# EAGLE board BUS_OUT (EAGLE 9.6.2)
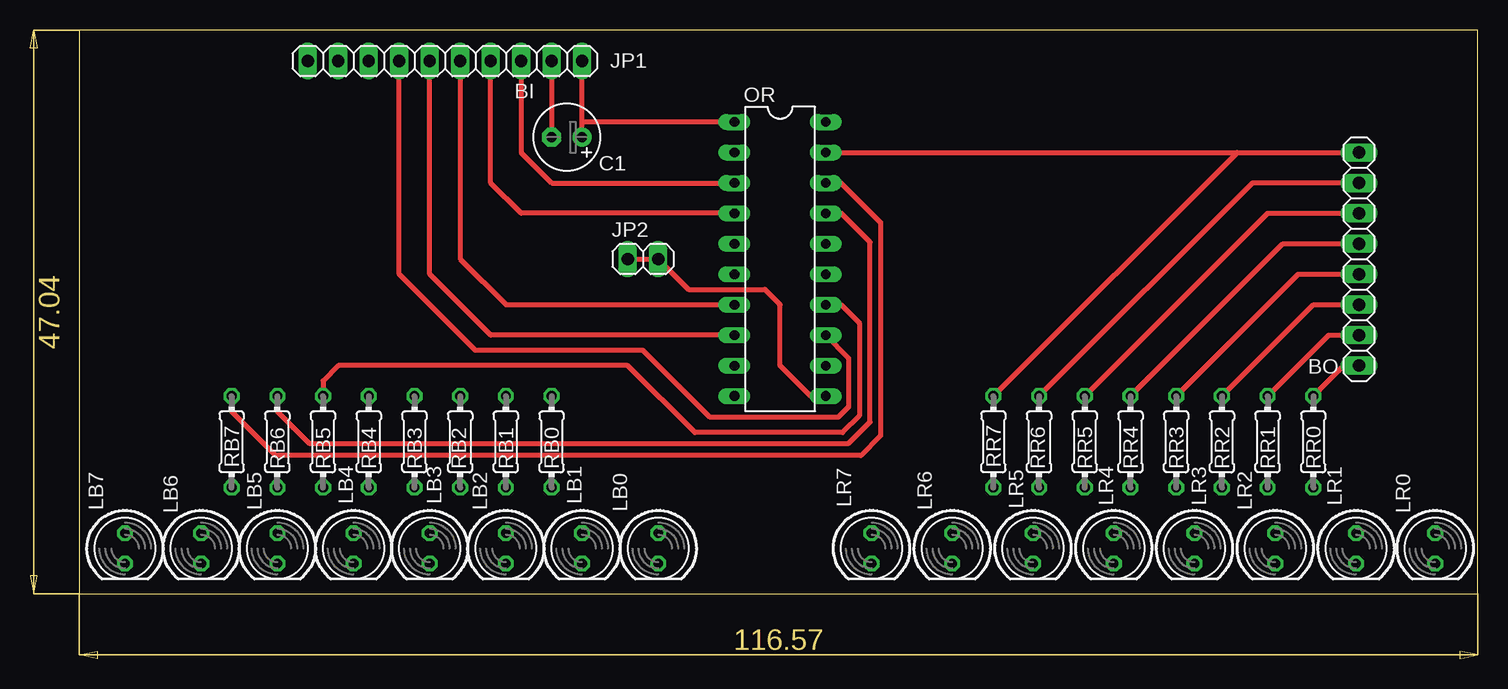
[diagram p0: board, top side]
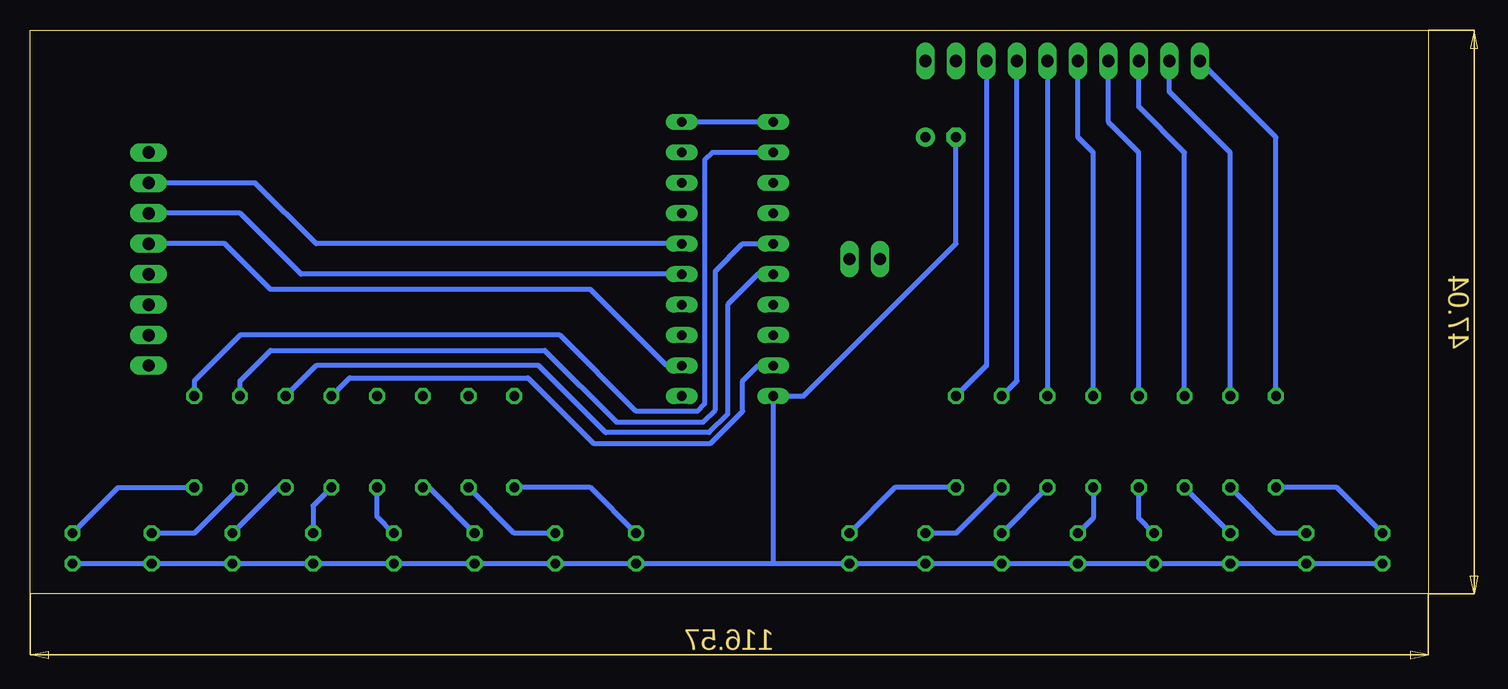
[diagram p1: board, bottom side, seen from below]

Size 116.57 x 47.04 mm. Coordinates in mm from the lower left corner, seen from the top.
Outline: 0,0 116.57,0 116.57,47.04 0,47.04 0,0
Copper layers (1*16): Top 0.035mm / dielectric 1.5mm / Bottom 0.035mm
Design rules "default": minimum track width 6mil, minimum drill 0.35mm, track to track 6mil, track to pad 6mil, pad to pad 6mil, via to via 6mil, smd to smd 6mil, copper to edge 40mil, drill to drill 6mil, minimum pad ring 10mil, minimum via ring 8mil, stop-mask expansion 4mil, vias tented up to drill 0mil, thermal gap 10mil

## Footprints (pad centres in the part's own frame; a part is rotated, then mirrored left to right if it is on the bottom)
1X08 = drill 1.016 long: 1 -8.89,0; 2 -6.35,0; 3 -3.81,0; 4 -1.27,0; 5 1.27,0; 6 3.81,0; 7 6.35,0; 8 8.89,0
E2,5-6 = drill 0.813 pad 1.6: + -1.27,0 | drill 0.813 pad 1.6 octagon: - 1.27,0
1X02 = drill 1.016 long: 1 -1.27,0; 2 1.27,0
LED5MM = drill 0.813 octagon: A -1.27,0; K 1.27,0
DIL20 = drill 0.813 long: 1 -11.43,-3.81; 2 -8.89,-3.81; 3 -6.35,-3.81; 4 -3.81,-3.81; 5 -1.27,-3.81; 6 1.27,-3.81; 7 3.81,-3.81; 8 6.35,-3.81; 9 8.89,-3.81; 10 11.43,-3.81; 11 11.43,3.81; 12 8.89,3.81; 13 6.35,3.81; 14 3.81,3.81; 15 1.27,3.81; 16 -1.27,3.81; 17 -3.81,3.81; 18 -6.35,3.81; 19 -8.89,3.81; 20 -11.43,3.81
0204/7 = drill 0.813 octagon: 1 -3.81,0; 2 3.81,0

## Placement (x,y rotation side)
BI  [1X08]  27.94,44.45 0 top
BO  [1X08]  106.68,27.94 90 top
C1  [E2,5-6]  40.64,38.1 180 top
JP1  [1X02]  40.64,44.45 0 top
JP2  [1X02]  46.99,27.94 0 top
LB0  [LED5MM]  48.26,3.81 270 top
LB1  [LED5MM]  41.91,3.81 270 top
LB2  [LED5MM]  35.56,3.81 270 top
LB3  [LED5MM]  29.21,3.81 270 top
LB4  [LED5MM]  22.86,3.81 270 top
LB5  [LED5MM]  16.51,3.81 270 top
LB6  [LED5MM]  10.16,3.81 270 top
LB7  [LED5MM]  3.81,3.81 270 top
LR0  [LED5MM]  113.03,3.81 270 top
LR1  [LED5MM]  106.43,3.81 270 top
LR2  [LED5MM]  99.69,3.81 270 top
LR3  [LED5MM]  92.96,3.81 270 top
LR4  [LED5MM]  86.23,3.81 270 top
LR5  [LED5MM]  79.5,3.81 270 top
LR6  [LED5MM]  72.77,3.81 270 top
LR7  [LED5MM]  66.04,3.81 270 top
OR  74273N  [DIL20]  58.42,27.94 270 top
RB0  [0204/7]  39.37,12.7 90 top
RB1  [0204/7]  35.56,12.7 90 top
RB2  [0204/7]  31.75,12.7 90 top
RB3  [0204/7]  27.94,12.7 90 top
RB4  [0204/7]  24.13,12.7 90 top
RB5  [0204/7]  20.32,12.7 90 top
RB6  [0204/7]  16.51,12.7 90 top
RB7  [0204/7]  12.7,12.7 90 top
RR0  [0204/7]  102.87,12.7 90 top
RR1  [0204/7]  99.06,12.7 90 top
RR2  [0204/7]  95.25,12.7 90 top
RR3  [0204/7]  91.44,12.7 90 top
RR4  [0204/7]  87.63,12.7 90 top
RR5  [0204/7]  83.82,12.7 90 top
RR6  [0204/7]  80.01,12.7 90 top
RR7  [0204/7]  76.2,12.7 90 top

## Library data of the parts
BI BO JP1 JP2 = pinhead
C1 = rcl; SPICEPREFIX: C
LB0 LB1-LB7 LR0 LR1-LR7 = led
OR = 74ttl-din
RB0 RB1-RB7 RR0 RR1-RR7 = rcl; SPICEPREFIX: R

## Nets
B0: BI.8 OR.3 RB0.2
B1: BI.7 OR.4 RB1.2
B2: BI.6 OR.7 RB2.2
B3: BI.5 OR.8 RB3.2
B4: BI.4 OR.13 RB4.2
B5: BI.3 OR.14 RB5.2
B6: BI.2 OR.17 RB6.2
B7: BI.1 OR.18 RB7.2
CLK: JP2.1 JP2.2 OR.11
GND: C1.- JP1.1 LB0.K LB1.K LB2.K LB3.K LB4.K LB5.K LB6.K LB7.K LR0.K LR1.K LR2.K LR3.K LR4.K LR5.K LR6.K LR7.K OR.10
N$1: LB7.A RB7.1
N$3: LB6.A RB6.1
N$5: LB5.A RB5.1
N$7: LB4.A RB4.1
N$9: LR7.A RR7.1
N$10: LB3.A RB3.1
N$11: BO.8 OR.19 RR7.2
N$12: LR6.A RR6.1
N$14: BO.7 OR.16 RR6.2
N$15: LR5.A RR5.1
N$16: LB2.A RB2.1
N$17: BO.6 OR.15 RR5.2
N$18: LR4.A RR4.1
N$20: BO.5 OR.12 RR4.2
N$21: LR3.A RR3.1
N$22: LB1.A RB1.1
N$23: BO.4 OR.9 RR3.2
N$24: LR2.A RR2.1
N$26: BO.3 OR.6 RR2.2
N$27: LR1.A RR1.1
N$28: LB0.A RB0.1
N$29: BO.2 OR.5 RR1.2
N$30: LR0.A RR0.1
N$32: BO.1 OR.2 RR0.2
VCC: C1.+ JP1.2 OR.1 OR.20

## Tracks (layer width: path | path; a pad name or v marks a point on that pad's centre or on a via)
B0
  Top 0.4: BI.8 36.83,36.83 39.37,34.29 OR.3
  Bottom 0.4: RB0.2 36.83,19.05 BI.8
B1
  Top 0.4: OR.4 36.83,31.75 34.29,34.29 BI.7
  Bottom 0.4: RB1.2 34.29,17.78 BI.7
B2
  Top 0.4: BI.6 31.75,27.94 35.56,24.13 OR.7
  Bottom 0.4: BI.6 RB2.2
B3
  Top 0.4: OR.8 34.29,21.59 29.21,26.67 BI.5
  Bottom 0.4: RB3.2 27.94,36.83 29.21,38.1 BI.5
B4
  Top 0.4: OR.13 64.14,19.68 64.14,15.62 63.25,14.73 52.58,14.73 46.99,20.32 33.02,20.32 26.67,26.67 BI.4
  Bottom 0.4: RB4.2 24.13,36.83 26.67,39.37 BI.4
B5
  Top 0.4: OR.14 63.5,24.13 65.02,22.61 65.02,14.86 63.63,13.46 51.31,13.46 45.72,19.05 21.59,19.05 20.32,17.78 RB5.2
  Bottom 0.4: RB5.2 20.32,36.83 24.13,40.64 BI.3
B6
  Top 0.4: RB6.2 16.51,15.24 19.18,12.57 64.14,12.57 65.91,14.35 65.91,29.34 63.5,31.75 OR.17
  Bottom 0.4: RB6.2 16.51,36.83 21.59,41.91 BI.2
B7
  Top 0.4: OR.18 63.5,34.29 66.8,30.99 66.8,13.21 65.15,11.56 16.38,11.56 12.7,15.24 RB7.2
  Bottom 0.4: RB7.2 12.7,38.1 BI.1
CLK
  Top 0.4: OR.11 60.96,16.51 58.42,19.05 58.42,24.13 57.15,25.4 50.8,25.4 JP2.2 JP2.1
GND
  Top 0.4: JP1.1 C1.-
  Bottom 0.4: LB7.K LB6.K LB5.K LB4.K LB3.K LB2.K LB1.K LB0.K 54.61,2.54 | 54.61,2.54 LR7.K LR6.K LR5.K LR4.K LR3.K LR2.K LR1.K LR0.K | 54.61,2.54 OR.10 52.07,16.51 39.37,29.21 C1.-
N$1
  Bottom 0.4: LB7.A 7.62,8.89 RB7.1
N$3
  Bottom 0.4: LB6.A 12.7,5.08 RB6.1
N$5
  Bottom 0.4: LB5.A RB5.1
N$7
  Bottom 0.4: LB4.A 24.13,6.35 RB4.1
N$9
  Bottom 0.4: LR7.A 69.85,8.89 RR7.1
N$10
  Bottom 0.4: RB3.1 27.94,6.35 LB3.A
N$11
  Top 0.4: RR7.2 96.52,36.83 | 96.52,36.83 BO.8 | OR.19 96.52,36.83
N$12
  Bottom 0.4: LR6.A 76.2,5.08 RR6.1
N$14
  Top 0.4: BO.7 97.79,34.29 RR6.2
  Bottom 0.4: BO.7 97.79,34.29 92.71,29.21 OR.16
N$15
  Bottom 0.4: LR5.A 83.31,8.89 RR5.1
N$16
  Bottom 0.4: RB2.1 LB2.A
N$17
  Top 0.4: RR5.2 99.06,31.75 BO.6
  Bottom 0.4: OR.15 93.98,26.67 99.06,31.75 BO.6
N$18
  Bottom 0.4: LR4.A 87.63,6.48 RR4.1
N$20
  Top 0.4: RR4.2 100.33,29.21 BO.5
  Bottom 0.4: OR.12 63.5,19.05 69.85,25.4 96.52,25.4 100.33,29.21 BO.5
N$21
  Bottom 0.4: RR3.1 92.96,7.37 LR3.A
N$22
  Bottom 0.4: RB1.1 39.37,5.08 LB1.A
N$23
  Top 0.4: RR3.2 101.6,26.67 BO.4
  Bottom 0.4: OR.9 55.88,19.05 57.15,17.78 57.15,15.24 59.82,12.57 69.6,12.57 75.06,18.03 89.92,18.03 RR3.2
N$24
  Bottom 0.4: LR2.A 95.89,8.89 RR2.1
N$26
  Top 0.4: RR2.2 102.87,24.13 BO.3
  Bottom 0.4: OR.6 55.88,26.67 58.42,24.13 58.42,14.99 59.94,13.46 68.58,13.46 74.17,19.05 92.71,19.05 RR2.2
N$27
  Bottom 0.4: RR1.1 102.87,5.08 LR1.A
N$28
  Bottom 0.4: RB0.1 44.45,8.89 LB0.A
N$29
  Top 0.4: RR1.2 104.14,21.59 BO.2
  Bottom 0.4: RR1.2 99.06,17.78 96.52,20.32 73.66,20.32 67.69,14.35 60.45,14.35 59.44,15.37 59.44,26.92 57.15,29.21 OR.5
N$30
  Bottom 0.4: LR0.A 109.22,8.89 RR0.1
N$32
  Top 0.4: RR0.2 105.41,19.05 BO.1
  Bottom 0.4: RR0.2 102.87,17.78 99.06,21.59 72.39,21.59 66.04,15.24 60.96,15.24 60.33,15.88 60.33,36.2 59.69,36.83 OR.2
VCC
  Top 0.4: C1.+ 41.91,39.37 | 41.91,39.37 JP1.2 | OR.1 41.91,39.37
  Bottom 0.4: OR.1 OR.20